# Altium PCB Nixie Valve Clock.PcbDoc (part 2 of 3)
Units mm, origin at the board's own origin, x right, y up, seen from the top; angles counter-clockwise.
Board outline 55 x 181 mm, 2 copper layers (Top Layer, Bottom Layer), stack 1.57 mm thick; 131 components, 140 nets, 506 pads, 541 vias.
Unrouted connection lines stored in the file: 104.
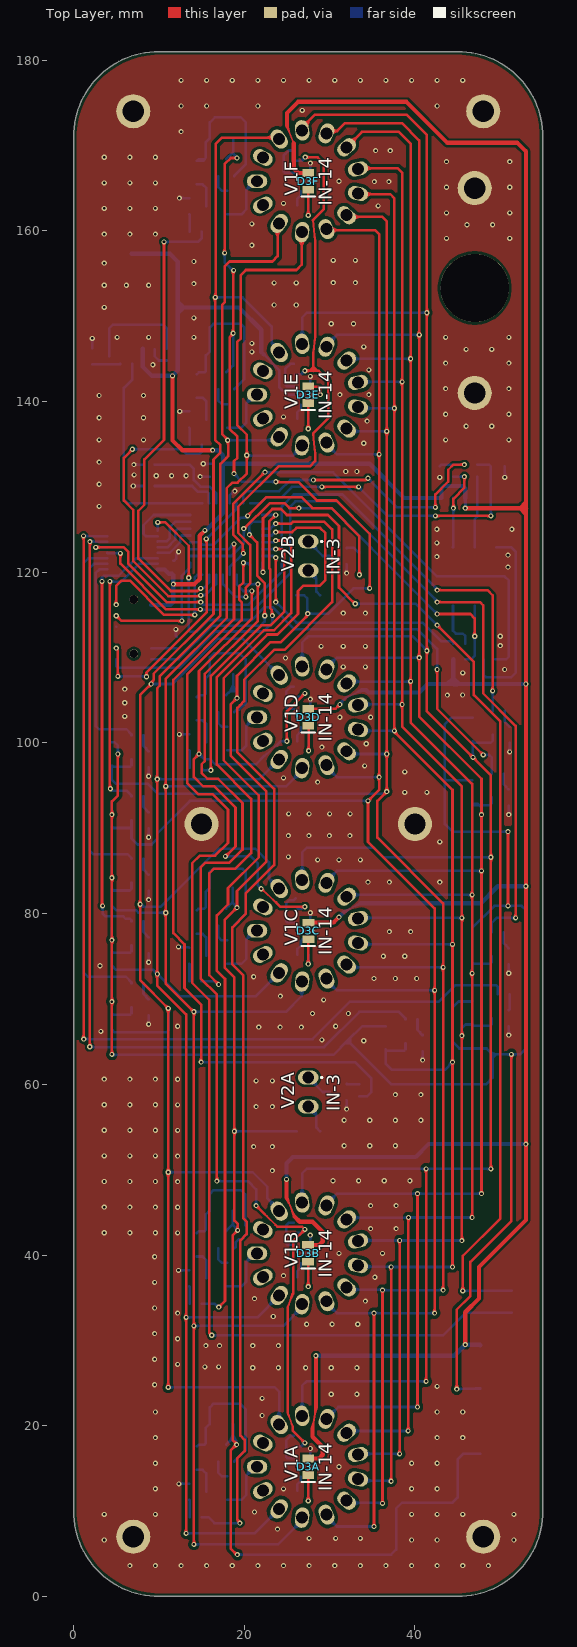
[diagram p0: Top Layer view]

## Via types
v1: diameter 0.6, hole 0.3, Top Layer to Bottom Layer, tented both sides, 541 vias

## Nets (pads, with @x,y where several pads share a name; then routed paths per layer and width w, separated by ;. In a path a pad name is that pad's centre, name@x,y a point inside that pad or via, vN(x,y) a via of type N, cw(c..) or ccw(c..) an arc to the next point about the centre after c; other vN are vias at no path point) (continued)
AS_0: (continued)
  Top Layer w0.3: v1(19.5,8.6) 19.5,8.681 19.2,8.981 19.2,16.2 20.042,17.042 20.042,18.343 19.55,18.835 19.55,41.732 20.274,42.456 20.274,43.926 19.9,44.3 19.9,72.746 18.6,74.046 18.6,78.4 20.2,80 20.2,82.4 23.5,85.7 23.5,94.6 19.2,98.9 19.2,104.1 19.5,104.4 19.502,104.4 20,104.898 20,107.4 23.5,110.9 24.7,110.9 30.3,116.5 30.3,125 29.4,125.9 25.7,125.9 25.5,125.7 v1(23.7,125.7)
  Bottom Layer w0.3: R21A.1@15,9.3 15.8,9.3 16.5,8.6 v1(19.5,8.6) ; U2.11@22.1,125.1 23.096,125.1 23.696,125.7 v1(23.7,125.7)
AS_1: R21B.1 U2.12 | length 112.1
  Top Layer w0.3: v1(17.012,33.907) 17.75,34.644 17.75,72.35 16.8,73.3 16.8,79.8 18.1,81.1 18.1,83 21.7,86.6 21.7,93.852 17.6,97.952 17.6,107.6 22.7,112.7 23.9,112.7 26.3,115.1 26.3,117.8 26.9,118.4 28.8,118.4 29.5,119.1 29.5,124.6 28.9,125.2 26.1,125.2 25.6,124.7 v1(23.7,124.7)
  Bottom Layer w0.3: R21B.1@15,34.303 16.534,34.303 16.931,33.907 v1(17.012,33.907) ; U2.12@22.1,124.3 23.219,124.3 23.619,124.7 v1(23.7,124.7)
AS_2: R21C.1 U2.13 | length 67.2
  Top Layer w0.3: v1(17,71.7) 15.9,72.8 15.9,84.7 16.466,85.266 18.966,85.266 20.8,87.1 20.8,93.452 16.8,97.452 16.8,107.7 22.3,113.2 23.5,113.2 25.5,115.2 25.5,123 24.8,123.7 v1(23.7,123.7)
  Bottom Layer w0.3: R21C.1@14.988,72.097 16.522,72.097 16.919,71.7 v1(17,71.7) ; U2.13@22.1,123.5 23.419,123.5 23.619,123.7 v1(23.7,123.7)
AS_3: R21D.1 U2.14 | length 33.8
  Top Layer w0.3: v1(16.1,96.8) 16.1,107.862 22.019,113.781 23.081,113.781 24.7,115.4 24.7,122.4 24.4,122.7 v1(23.7,122.7)
  Bottom Layer w0.3: R21D.1@15.004,97.101 15.004,97.001 15.204,96.801 v1@16.099,96.801 ; U2.14@22.1,122.7 v1(23.7,122.7) ; v1@16.099,96.801 v1(16.1,96.8)
AS_4: R21E.1 U2.22 | length 36.2
  Top Layer w0.3: v1(6.9,134.4) 5.9,133.4 5.9,128.4 7,127.3 7,121.3 11.1,117.2 14.618,117.2 14.643,117.226 14.855,117.226 v1(14.913,117.283)
  Bottom Layer w0.3: v1(6.9,134.4) 12.7,134.4 13.2,133.9 14.8,133.9 15,134.1 15,134.908 R21E.1@15.001,134.909 ; v1(14.913,117.283) 14.97,117.34 15.44,117.34 16.7,118.6 U2.22@16.7,119.7
AS_5: R21F.1 U2.23 | length 54.9
  Top Layer w0.3: v1(10.6,158.7) 10.6,135.5 8.3,133.2 8.3,127.9 7.6,127.2 7.6,121.6 11.4,117.8 14.519,117.8 14.819,118.1 v1(14.9,118.1)
  Bottom Layer w0.3: v1(10.6,158.7) 14.6,158.7 15,159.1 15,159.897 R21F.1@15.006,159.902 ; v1(14.9,118.1) 14.957,118.157 15.257,118.157 15.9,118.8 U2.23@15.9,119.7
BCD0: U1.10 U2.32 | length 8.8
  Bottom Layer w0.3: U1.10@9.85,124.225 8.475,124.225 8.2,124.5 8.2,125.5 9.4,126.7 U2.32@13.7,126.7
BCD1: U1.13 U2.29 | length 5
  Bottom Layer w0.3: U1.13@9.85,122.275 11.275,122.275 12.5,123.5 12.5,124.1 12.7,124.3 U2.29@13.7,124.3